# EAGLE board Smart car Parking v1 (EAGLE 9.7.0)
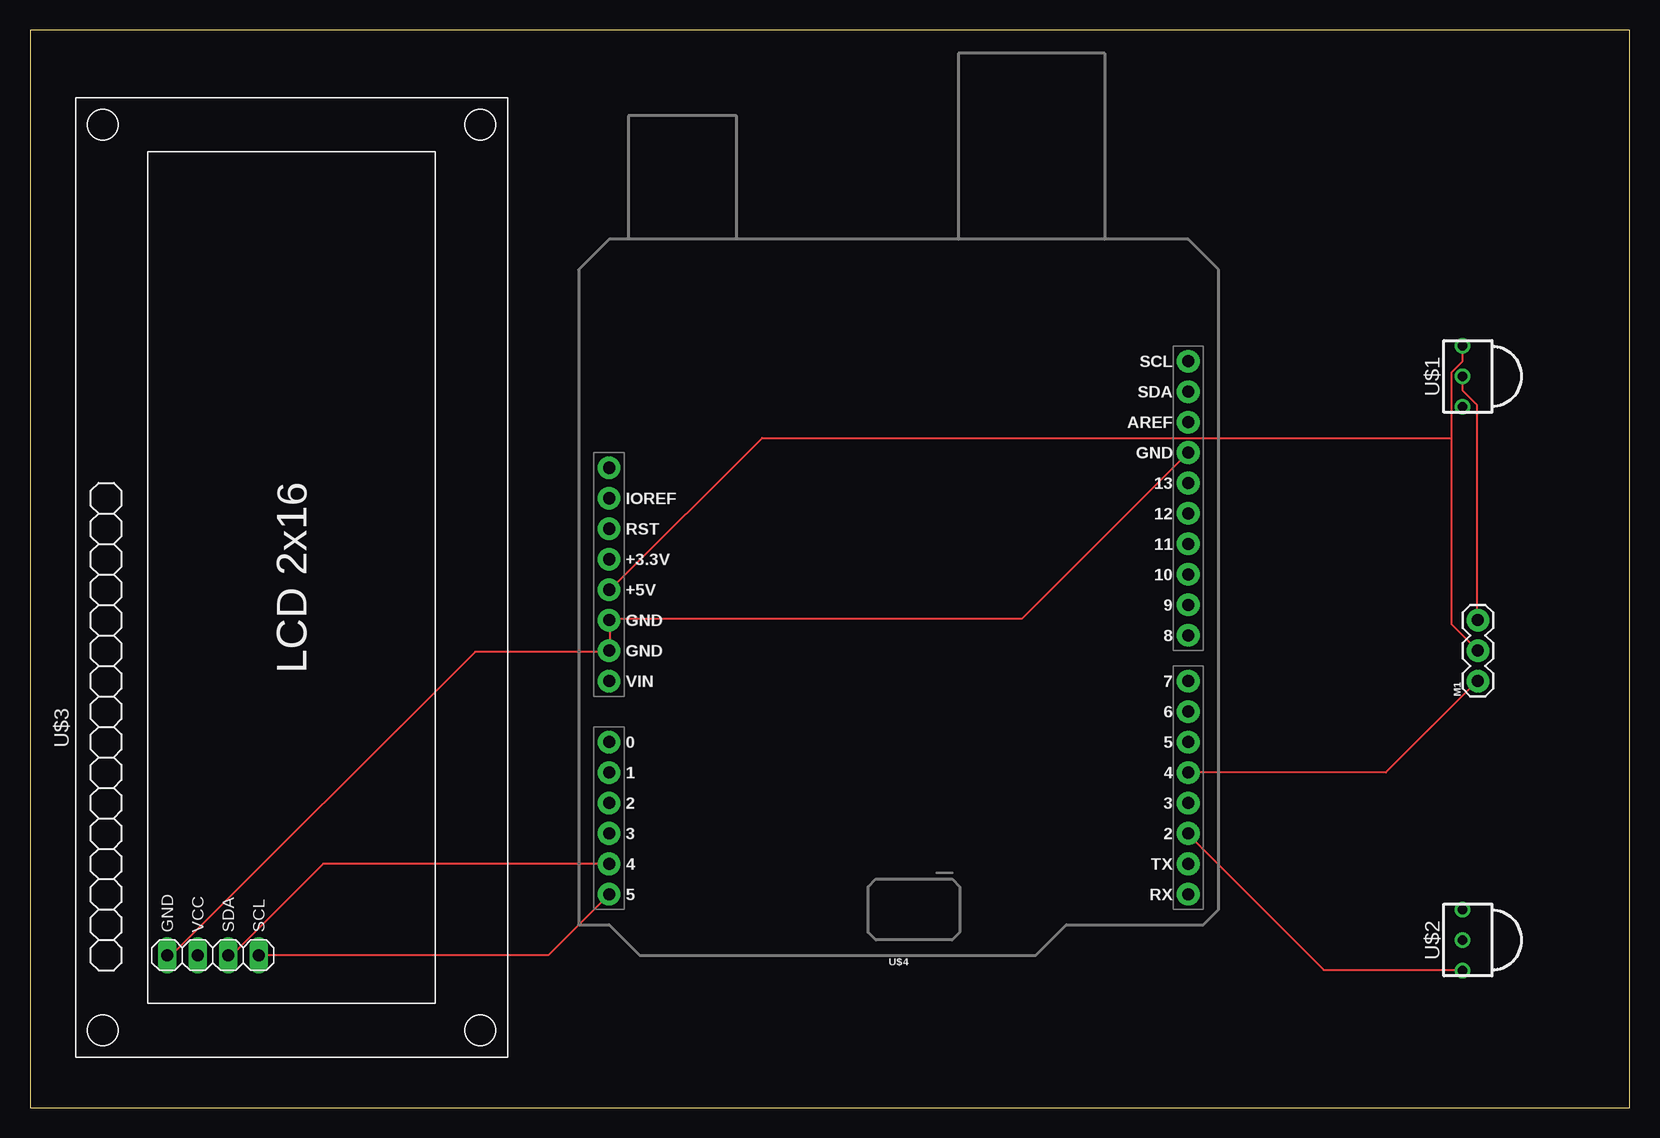
[diagram p0: board, top side]
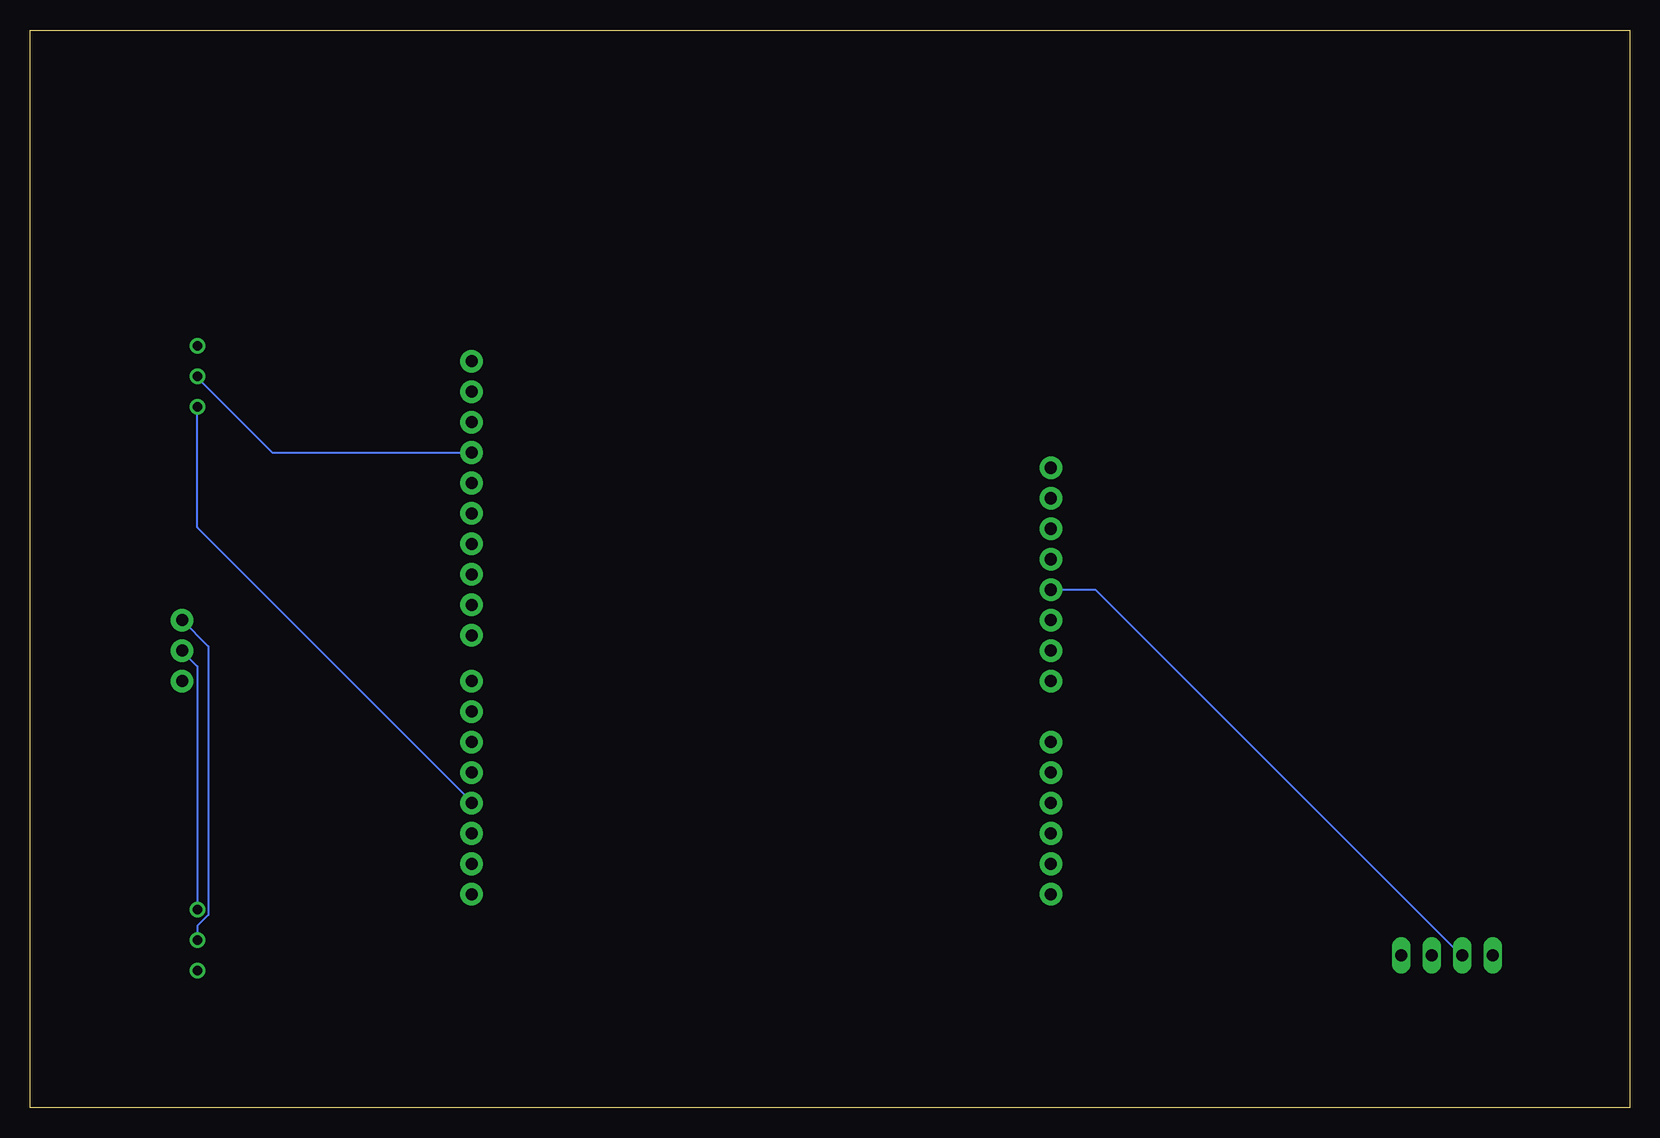
[diagram p1: board, bottom side, seen from below]

Size 133.33 x 89.84 mm. Coordinates in mm from the lower left corner, seen from the top.
Outline: 0,89.84 0,0 133.33,0 133.33,89.84 0,89.84
Copper layers (1*16): Top / Bottom
Stack-up Default Layer Stack: Top User Defined 0.035mm / Dielectric-1 User Defined 1.5mm / Bottom User Defined 0.035mm
Design rules: minimum copper width 6mil, minimum drill size 0.35mm, copper clearance wire_polygon to wire_polygon 6mil, copper clearance wire_polygon to pad_smd 6mil, copper clearance wire_polygon to via 6mil, copper clearance pad_smd to pad_smd 6mil, copper clearance pad_smd to via 6mil, copper clearance via to via 6mil, copper clearance smd to pad (same net) 6mil, copper clearance smd to via (same net) 6mil, copper clearance smd to smd (same net) 6mil, dimension clearance 40mil, via restrict clearance 0mil, restrict clearance 0mil, drill distance 6mil, keepout clearance 0mil

## Footprints (pad centres in the part's own frame; a part is rotated, then mirrored left to right if it is on the bottom)
1X03 = drill 1.016 pad 1.88: 1 0,0; 2 2.54,0; 3 5.08,0
TSOP48 = drill 0.8: 1 -2.54,0; 2 0,0; 3 2.54,0
LCD-I2C = drill 1.016 long: 1 -19.05,-5.08; 2 -19.05,-7.62; 3 -19.05,-10.16; 4 -19.05,-12.7
ARDUINO-UNO-R3-SHIELD = drill 1.016 pad 1.88: 3.3V 24.13,-2.54; 5V 24.13,0; A0 24.13,12.7; A1 24.13,15.24; A2 24.13,17.78; A3 24.13,20.32; A4 24.13,22.86; A5 24.13,25.4; AREF -24.13,-13.97; D2 -24.13,20.32; D3 -24.13,17.78; D4 -24.13,15.24; D5 -24.13,12.7; D6 -24.13,10.16; D7 -24.13,7.62; D8 -24.13,3.81; D9 -24.13,1.27; D10 -24.13,-1.27; D11 -24.13,-3.81; D12 -24.13,-6.35; D13 -24.13,-8.89; GND@0 24.13,2.54; GND@1 24.13,5.08; GND@2 -24.13,-11.43; IOREF 24.13,-7.62; NC 24.13,-10.16; RES 24.13,-5.08; RX -24.13,25.4; SCL -24.13,-19.05; SDA -24.13,-16.51; TX -24.13,22.86; VIN 24.13,7.62

## Placement (x,y rotation side)
M1  SERVO  [1X03]  120.65,35.56 90 top
U$1  IR-RECEIVERTSOP48  [TSOP48]  119.38,60.96 90 top
U$2  IR-RECEIVERTSOP48  [TSOP48]  119.38,13.97 90 top
U$3  LCD-16X2-I2CSUNFOUNDER-IIC  [LCD-I2C]  6.35,31.75 90 top
U$4  ARDUINO-UNO-R3-SHIELD  [ARDUINO-UNO-R3-SHIELD]  72.39,43.18 180 top

## Library data of the parts
M1 = SparkFun-Electromechanical
U$1-U$4 = Tinkercad

## Nets
N$1: U$3.3 U$4.A4
N$2: U$3.4 U$4.A5
N$3: M1.2 U$1.3 U$2.3 U$3.2 U$4.5V
N$4: M1.3 U$1.2 U$2.2 U$3.1 U$4.GND@0 U$4.GND@1 U$4.GND@2
N$5: U$2.1 U$4.D2
N$6: U$1.1 U$4.D3
N$7: M1.1 U$4.D4

## Tracks (layer width: path | path; a pad name or v marks a point on that pad's centre or on a via)
N$1
  Top 0.152: U$3.3 16.82,12.7 24.44,20.32 U$4.A4
N$2
  Top 0.152: U$3.4 43.18,12.7 U$4.A5
N$3
  Top 0.152: U$1.3 119.38,62.23 118.47,61.32 118.47,55.83 | 118.47,55.83 118.47,40.28 M1.2 | 118.47,55.83 61.01,55.83 48.36,43.18 U$4.5V
  Bottom 0.152: U$2.3 119.38,36.78 120.6,38 M1.2 | U$4.5V 44.55,43.18 14.07,12.7 U$3.2
N$4
  Top 0.152: U$3.1 11.79,12.7 37.08,38 48.21,38 U$4.GND@1 48.36,38.15 48.36,40.59 U$4.GND@0 48.36,40.74 82.65,40.74 U$4.GND@2 | U$1.2 119.38,59.79 120.6,58.57 120.6,40.74 M1.3
  Bottom 0.152: U$2.2 119.38,15.14 118.47,16.05 118.47,38.46 M1.3 | U$4.GND@2 113.13,54.61 119.38,60.86 U$1.2
N$5
  Top 0.152: U$2.1 119.38,11.48 107.8,11.48 96.52,22.76 U$4.D2
N$6
  Bottom 0.152: U$1.1 119.38,48.36 96.52,25.5 U$4.D3
N$7
  Top 0.152: U$4.D4 112.98,27.94 120.6,35.56 M1.1